# EAGLE board ME_433_HW3 (EAGLE 8.1.0)
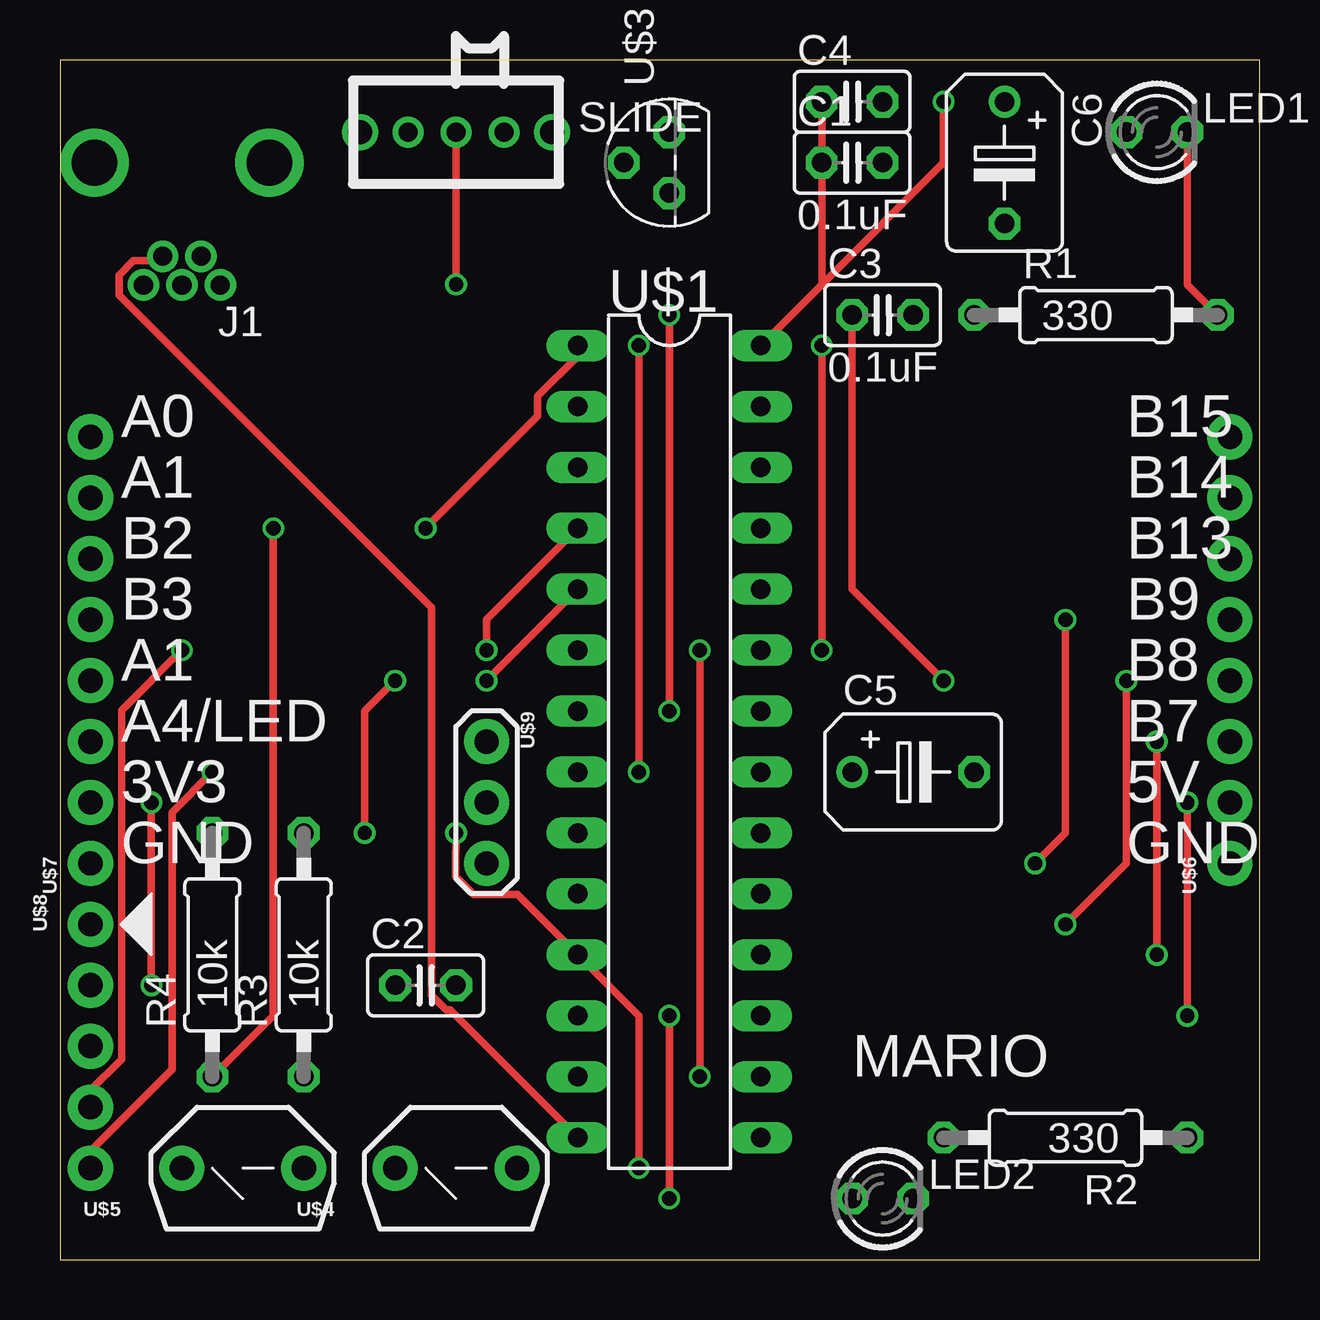
[diagram p0: board, top side]
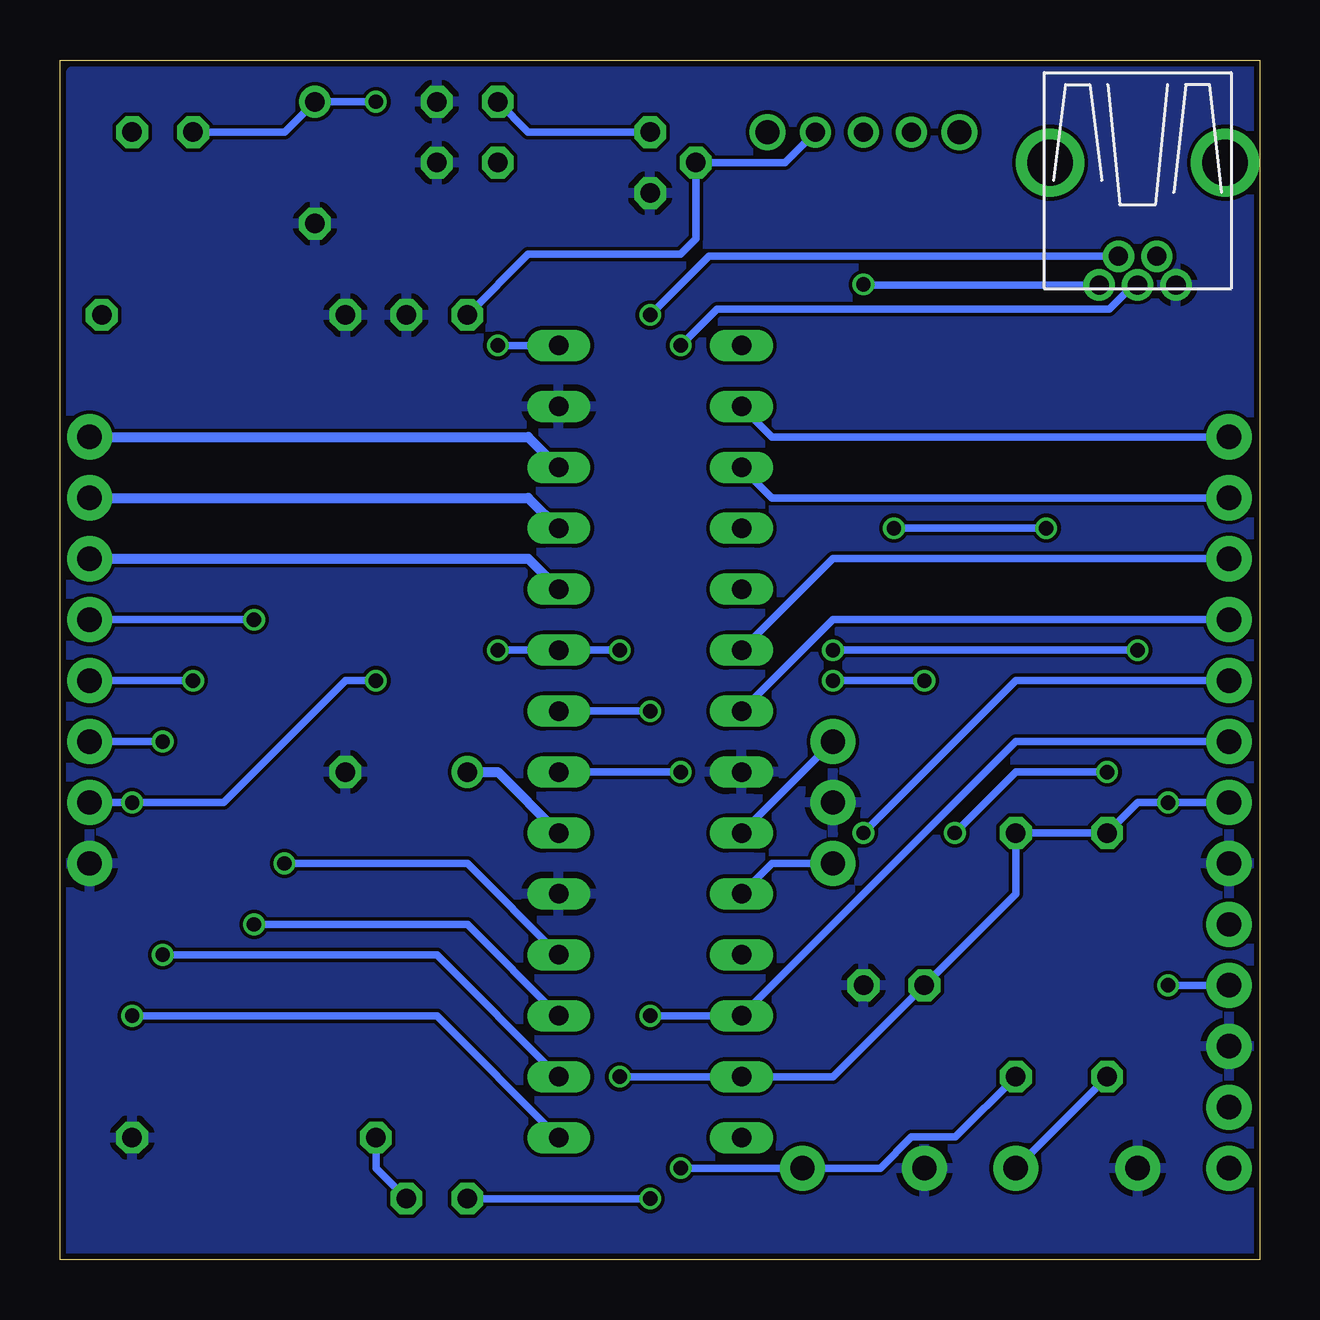
[diagram p1: board, bottom side, seen from below]

Size 50 x 50 mm. Coordinates in mm from the lower left corner, seen from the top.
Outline: 0,0 50,0 50,50 0,50 0,0
Copper layers (1*16): Top 0.035mm / dielectric 1.5mm / Bottom 0.035mm
Design rules "SeeedStudio_2layer_DRU_no_angle_20140221": minimum track width 6mil, minimum drill 12mil, track to track 6mil, track to pad 6mil, pad to pad 6mil, via to via 6mil, smd to smd 0mil, copper to edge 10mil, drill to drill 10mil, minimum pad ring 10mil, minimum via ring 6mil, stop-mask expansion 2mil, vias tented up to drill 100mil, thermal gap 10mil

## Footprints (pad centres in the part's own frame; a part is rotated, then mirrored left to right if it is on the bottom)
C025-025X050 = drill 0.813 octagon: 1 -1.27,0; 2 1.27,0
B45181B = drill 0.813: + -2.54,0 | drill 0.813 octagon: - 2.54,0
USB-MB-H = drill 0.8: D+ 5.1,0; D- 3.9,0.8; GND 5.1,-1.6; ID 3.9,-0.8; VBUS 5.1,1.6 | drill 1.9: P$6 0,-3.65; P$7 0,3.65
LED3MM = drill 0.813 octagon: A -1.27,0; K 1.27,0
0207/10 = drill 0.813 octagon: 1 -5.08,0; 2 5.08,0
DIL28-3 = drill 0.813 long: 1 -16.51,-3.81; 2 -13.97,-3.81; 3 -11.43,-3.81; 4 -8.89,-3.81; 5 -6.35,-3.81; 6 -3.81,-3.81; 7 -1.27,-3.81; 8 1.27,-3.81; 9 3.81,-3.81; 10 6.35,-3.81; 11 8.89,-3.81; 12 11.43,-3.81; 13 13.97,-3.81; 14 16.51,-3.81; 15 16.51,3.81; 16 13.97,3.81; 17 11.43,3.81; 18 8.89,3.81; 19 6.35,3.81; 20 3.81,3.81; 21 1.27,3.81; 22 -1.27,3.81; 23 -3.81,3.81; 24 -6.35,3.81; 25 -8.89,3.81; 26 -11.43,3.81; 27 -13.97,3.81; 28 -16.51,3.81
SLIDE = drill 0.8: 1 -2,0; 2 0,0; 3 2,0 | drill 1: P$1 -4,0; P$2 4,0
TO92 = drill 0.813 octagon: 1 -1.27,0; 2 0,1.905; 3 1.27,0
PB = drill 1.016 pad 1.88: 1 0,0; 2 5.08,0
1X08 = drill 1.016 pad 1.88: 1 0,0; 2 2.54,0; 3 5.08,0; 4 7.62,0; 5 10.16,0; 6 12.7,0; 7 15.24,0; 8 17.78,0
1X05 = drill 1.016 pad 1.88: 1 0,0; 2 2.54,0; 3 5.08,0; 4 7.62,0; 5 10.16,0
OSC = drill 1.016 pad 1.88: 1 -2.54,0; 2 0,0; 3 2.54,0

## Placement (x,y rotation side)
C1  0.1uF  [C025-025X050]  33.02,45.72 0 top
C2  0.1uF  [C025-025X050]  15.24,11.43 0 top
C3  0.1uF  [C025-025X050]  34.29,39.37 0 top
C4  0.1uF  [C025-025X050]  33.02,48.26 0 top
C5  10uF  [B45181B]  35.56,20.32 0 top
C6  10uF  [B45181B]  39.37,45.72 270 top
J1  USB-MB-H  [USB-MB-H]  5.08,45.72 270 top
LED1  Red  [LED3MM]  45.72,46.99 0 top
LED2  Green  [LED3MM]  34.29,2.54 0 top
R1  330  [0207/10]  43.18,39.37 0 top
R2  330  [0207/10]  41.91,5.08 180 top
R3  10k  [0207/10]  10.16,12.7 90 top
R4  10k  [0207/10]  6.35,12.7 90 top
U$1  PIC32MX250  [DIL28-3]  25.4,21.59 270 top
U$2  SLIDE  [SLIDE]  16.51,46.99 0 top
U$3  MCP1702  [TO92]  25.4,45.72 90 top
U$4  RESET  [PB]  19.05,3.81 180 top
U$5  USER  [PB]  10.16,3.81 180 top
U$6  CONN_08  [1X08]  48.77,16.51 90 top
U$7  CONN_08  [1X08]  1.27,16.51 90 top
U$8  PICKIT3  [1X05]  1.27,13.97 270 top
U$9  8MHz  [OSC]  17.78,19.05 270 top

## Library data of the parts
C1-C6 R1-R4 = resistor
J1 U$1-U$9 = ME433_HW3
LED1 LED2 = led

## Nets
+3V3: C1.1 C2.1 C4.1 C6.+ LED1.A R3.2 R4.2 U$1.13 U$1.23 U$1.28 U$3.3 U$7.2 U$8.2
+5V: C3.1 U$1.15 U$2.3 U$3.2 U$6.2
A0: U$1.2 U$7.8
A1: U$1.3 U$7.7
A4/LED: LED2.A U$1.12 U$7.3
B2: U$1.6 U$7.6
B3: U$1.7 U$7.5
B4/USER: R3.1 U$1.11 U$4.1 U$7.4
B7: U$1.16 U$6.3
B8: U$1.17 U$6.4
B9: U$1.18 U$6.5
B13: U$1.24 U$6.6
B14: U$1.25 U$6.7
B15: U$1.26 U$6.8
D+: J1.D+ U$1.21
D-: J1.D- U$1.22
GND: C1.2 C2.2 C3.2 C4.2 C5.- C6.- J1.GND R1.1 R2.1 U$1.8 U$1.19 U$1.27 U$3.1 U$4.2 U$5.2 U$6.1 U$7.1 U$8.3 U$9.2
MCLR: R4.1 U$1.1 U$5.1
MLCR: U$8.1
N$1: J1.VBUS U$2.2
N$2: U$1.9 U$9.1
N$3: U$1.10 U$9.3
N$4: LED1.K R1.2
N$5: LED2.K R2.2
N$6: C5.+ U$1.20
PGC: U$1.5 U$8.5
PGD: U$1.4 U$8.4
USBID: J1.ID U$1.14

## Tracks (layer width: path | path; a pad name or v marks a point on that pad's centre or on a via)
+3V3  (via drill 0.6)
  Top 0.305: 31.75,40.64 C1.1 C4.1 | 31.75,40.64 U$1.28 | v36.83,48.26 36.83,45.72 31.75,40.64 | v31.75,38.1 v31.75,25.4 | v26.67,25.4 v26.67,7.62 | v3.81,11.43 v3.81,19.05
  Bottom 0.305: LED1.A 40.64,46.99 C6.+ v36.83,48.26 | U$3.3 30.48,46.99 C4.1 | U$1.28 v31.75,38.1 | v31.75,25.4 U$1.23 v26.67,25.4 | v26.67,7.62 U$1.13 17.78,7.62 C2.1 10.16,15.24 R3.2 R4.2 5.08,19.05 v3.81,19.05 U$7.2 | U$8.2 v3.81,11.43
+5V  (via drill 0.6)
  Top 0.305: v46.99,19.05 v46.99,10.16 | C3.1 33.02,27.94 v36.83,24.13
  Bottom 0.305: U$6.2 v46.99,19.05 43.18,19.05 38.1,24.13 v36.83,24.13 | v46.99,10.16 34.29,10.16 U$1.15 | U$2.3 19.78,45.72 U$3.2 23.5,42.55 24.13,41.91 30.48,41.91 C3.1
A0
  Bottom 0.305: U$7.8 20.32,34.29 U$1.2
A1
  Bottom 0.305: U$7.7 20.32,31.75 U$1.3
A4/LED  (via drill 0.6)
  Top 0.305: v25.4,2.54 v25.4,10.16
  Bottom 0.305: LED2.A v25.4,2.54 | v25.4,10.16 U$1.12 10.16,21.59 U$7.3
B2
  Bottom 0.305: U$7.6 17.78,29.21 U$1.6
B3
  Bottom 0.305: U$7.5 17.78,26.67 U$1.7
B4/USER  (via drill 0.6)
  Top 0.305: v24.13,3.81 24.13,10.16 U$1.11 19.07,15.21 17.24,15.21 16.48,15.97 16.48,17.05 16.51,17.07 v16.51,17.78
  Bottom 0.305: R3.1 12.68,5.11 14.51,5.11 15.8,3.81 U$4.1 v24.13,3.81 | U$7.4 10.16,24.13 v16.51,17.78
B7  (via drill 0.6)
  Top 0.305: v45.72,21.59 v45.72,12.7
  Bottom 0.305: U$6.3 v45.72,21.59 | v45.72,12.7 34.29,12.7 U$1.16
B8  (via drill 0.6)
  Top 0.305: v44.45,24.13 44.45,16.51 v41.91,13.97
  Bottom 0.305: U$6.4 v44.45,24.13 | v41.91,13.97 33.02,13.97 U$1.17
B9  (via drill 0.6)
  Top 0.305: v41.91,26.67 41.91,17.78 v40.64,16.51
  Bottom 0.305: U$6.5 v41.91,26.67 | v40.64,16.51 33.02,16.51 U$1.18
B13
  Bottom 0.406: U$6.6 30.48,29.21 U$1.24
B14
  Bottom 0.406: U$6.7 30.48,31.75 U$1.25
B15
  Bottom 0.406: U$6.8 30.48,34.29 U$1.26
D+  (via drill 0.6)
  Top 0.305: v24.13,38.1 v24.13,20.32
  Bottom 0.305: J1.D+ 5.25,40.62 6.26,39.61 22.62,39.61 v24.13,38.1 | v24.13,20.32 U$1.21
D-  (via drill 0.6)
  Top 0.305: v25.4,39.37 v25.4,22.86
  Bottom 0.305: J1.D- 22.95,41.82 v25.4,39.37 | v25.4,22.86 U$1.22
GND
  pour Bottom: 0,49.53 0,0 49.53,0 49.53,49.53
MCLR  (via drill 0.6)
  Top 0.305: v15.24,30.48 19.91,35.15 19.91,35.98 21.59,37.66 U$1.1 | v8.89,30.48 8.89,10.16 R4.1
  Bottom 0.305: v15.24,30.48 v8.89,30.48 | U$5.1 R4.1
N$1  (via drill 0.6)
  Top 0.305: v16.51,40.64 U$2.2
  Bottom 0.305: J1.VBUS 16.49,40.62 v16.51,40.64
N$2
  Bottom 0.305: U$9.1 U$1.9
N$3
  Bottom 0.305: U$9.3 20.32,16.51 U$1.10
N$4
  Top 0.305: LED1.K 46.99,40.64 R1.2
N$5
  Bottom 0.305: R2.2 36.83,3.81 LED2.K
N$6
  Bottom 0.406: C5.+ 31.75,20.32 U$1.20
PGC  (via drill 0.6)
  Top 0.305: U$8.5 1.27,4.52 4.67,7.92 4.67,18.64 v6.35,20.32 | v12.7,17.78 12.7,22.86 v13.97,24.13 | v17.78,24.13 U$1.5
  Bottom 0.305: v6.35,20.32 10.16,20.32 v12.7,17.78 | v13.97,24.13 v17.78,24.13
PGD  (via drill 0.6)
  Top 0.305: U$8.4 1.27,7.06 2.56,8.35 2.56,22.89 v5.08,25.4 | v17.78,25.4 17.78,26.67 U$1.4
  Bottom 0.305: v5.08,25.4 v17.78,25.4
USBID
  Top 0.305: U$1.14 16.26,10.41 16.09,10.41 15.49,11.01 15.49,27.18 2.47,40.2 2.47,41.04 3.06,41.63 4.09,41.63 J1.ID

## Text on the board
tPlace: A0 | B15 | A1 | B14 | B2 | B13 | B3 | B9 | A1 | B8 | A4/LED | B7 | 3V3 | 5V | GND | GND | MARIO